# Altium PCB PCB1.PcbDoc
Units mil, origin at the board's own origin, x right, y up, seen from the top; angles counter-clockwise.
Board outline 2590 x 1505 mil, 2 copper layers (Top Layer, Bottom Layer); 24 components, 23 nets, 72 pads, 3 vias.
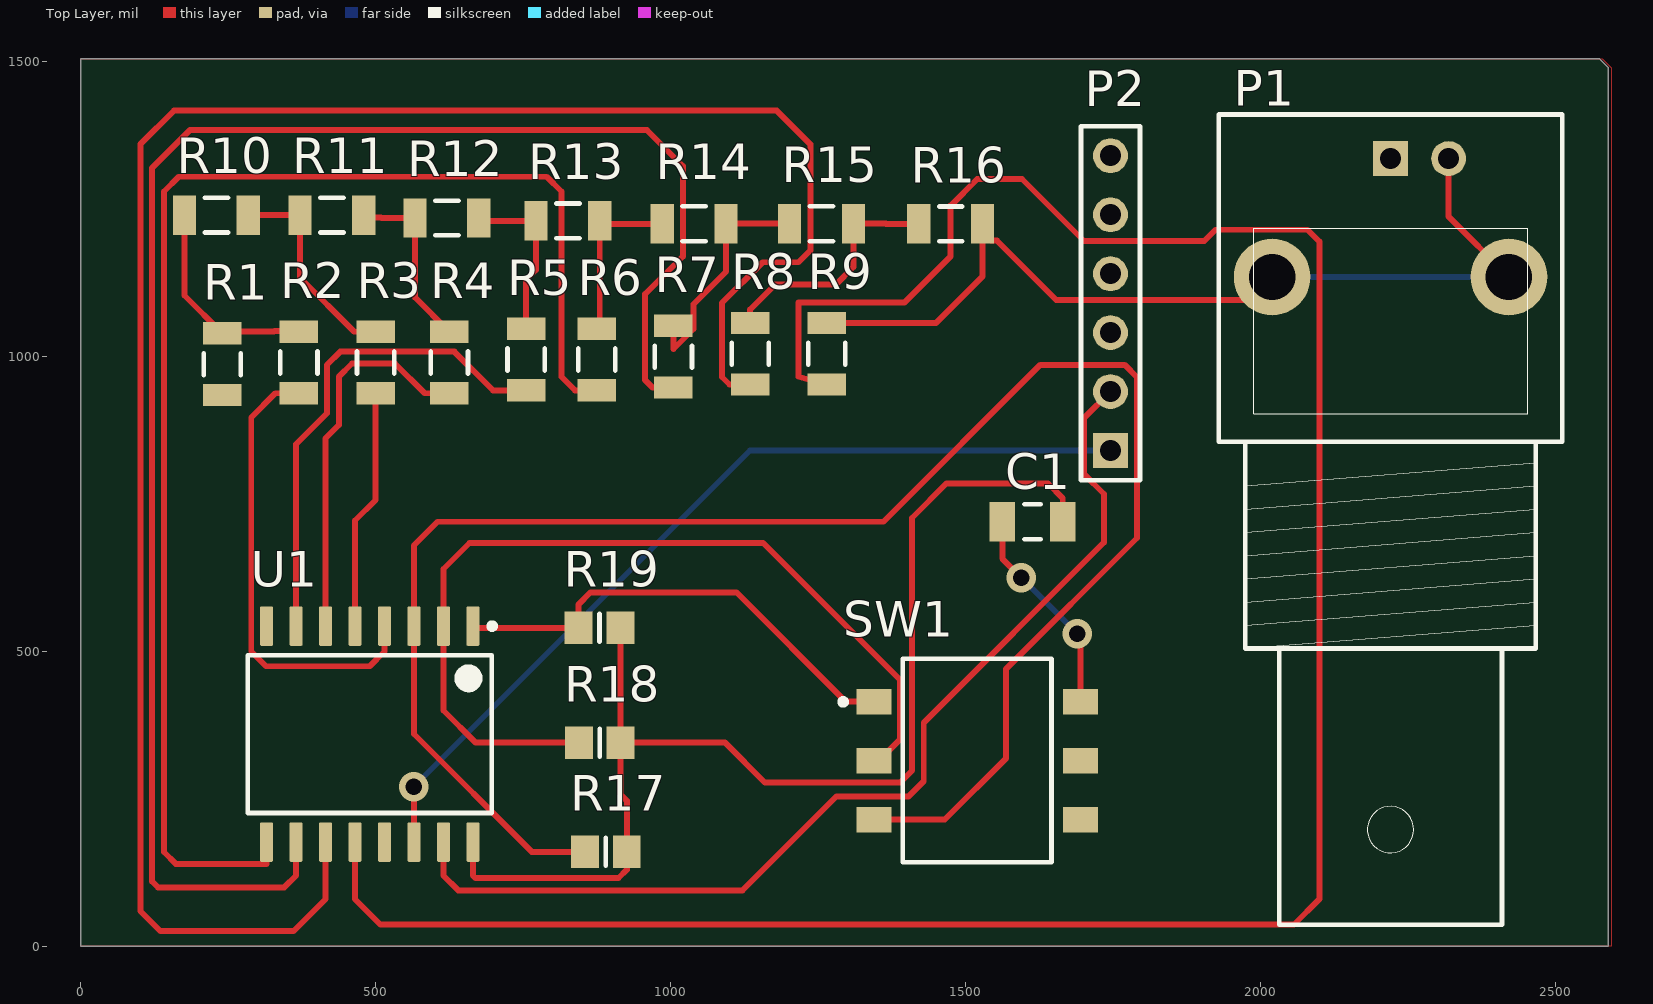
[diagram p0: Top Layer view]
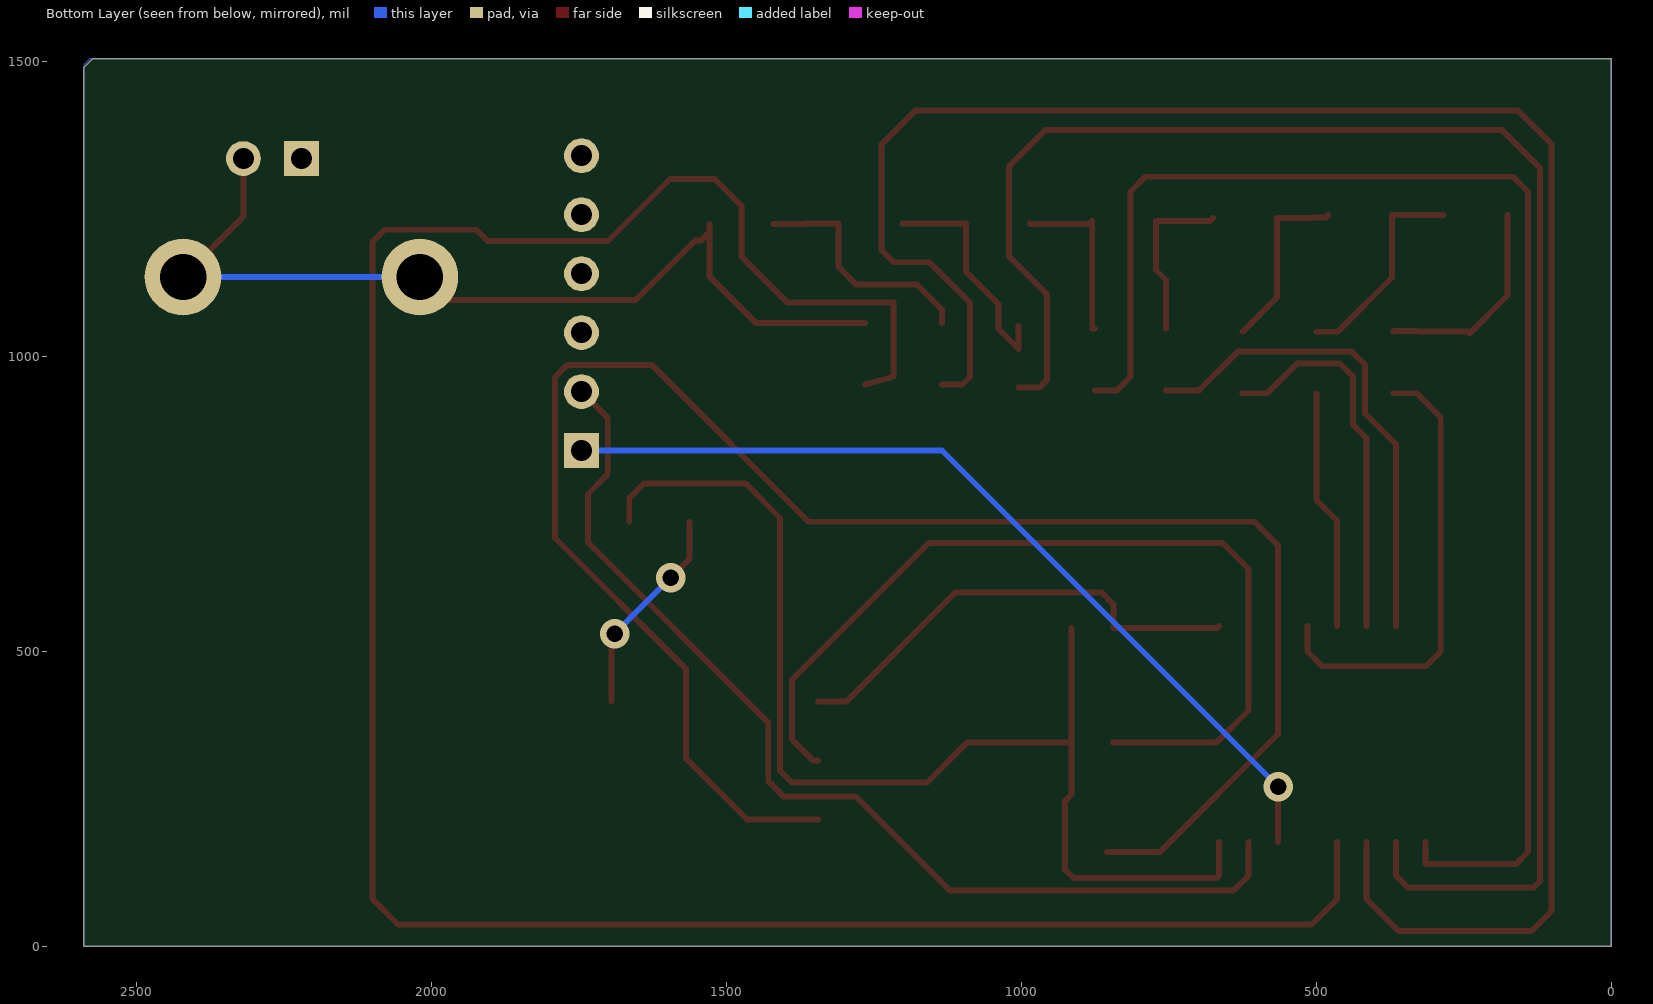
[diagram p1: Bottom Layer view, seen from below]

## Layer stack, top to bottom
Top Solder: solder mask 0.4, Solder Resist, Dk 3.5
Top Layer: signal copper 1.4
Dielectric 1: dielectric 12.6, FR-4, Dk 4.8
Bottom Layer: signal copper 1.4
Bottom Solder: solder mask 0.4, Solder Resist, Dk 3.5

## Board outline
0,0 0,1505 2575,1505 2590,1490 2590,0

## Design rules (kind name [scope] priority, off if disabled: settings)
Clearance [All] p1: gap=10 ignorepadtopadclearanceinfootprint=FALSE except(0: Arc-Hole Track-Hole SMDPad-Hole THPad-Hole Via-Hole Fill-Hole Poly-Hole Region-Hole Text-Hole)
PolygonConnect [All] p1: connectstyle=Relief reliefconductorwidth=10 reliefentries=4 polygonreliefangle="90 Angle" airgapwidth=10
RoutingVias [All] p1: holewidth=28 width=50 viastyle="Through Hole" minholewidth=28 minwidth=50 maxholewidth=28 maxwidth=50
SolderMaskExpansion [All] p1: expansion=4 istentingtop=FALSE
Width [All] p1: maxlimit=10 minlimit=10 preferedwidth=10
30 further rules are at their usual default settings.

## Components (designator, comment, footprint, x,y, rotation, side; value= is the part's Value field where it differs from the comment)
C1 "1uF" CAPC3216X110X50LL20T25 1613.82,720 r0 top
P1 "BNC" "BNC_RA CON" 2220.79,1335.79 r90 top
P2 "Header 6" HDR1X6 1745.98,840.63 r90 top
R1 "10k" FP-CRCW1206-e3-IPC_C 240,987.21 r90 top
R2 "10k" FP-CRCW1206-e3-IPC_C 370,990 r90 top
R3 "10k" FP-CRCW1206-e3-IPC_C 500,990 r90 top
R4 "10k" FP-CRCW1206-e3-IPC_C 625,990 r90 top
R5 "10k" FP-CRCW1206-e3-IPC_C 755,995 r90 top
R6 "10k" FP-CRCW1206-e3-IPC_C 875,995 r90 top
R7 "10k" FP-CRCW1206-e3-IPC_C 1005,1000 r90 top
R8 "10k" FP-CRCW1206-e3-IPC_C 1135,1005 r90 top
R9 "10k" FP-CRCW1206-e3-IPC_C 1265,1005 r90 top
R10 "5k" RESC3216X84X51LL20T13 230,1240 r0 top
R11 "5k" RESC3216X84X51LL20T13 425.87,1240 r0 top
R12 "5k" RESC3216X84X51LL20T13 620.87,1235 r0 top
R13 "5k" RESC3216X84X51LL20T13 825.87,1230 r0 top
R14 "5k" RESC3216X84X51LL20T13 1040,1225.35 r0 top
R15 "5k" RESC3216X84X51LL20T13 1255.87,1225.35 r0 top
R16 "5k" RESC3216X84X51LL20T13 1475,1225 r0 top
R17 "Res3" 6-0805_N 890.43,160.35 r0 top value=4.7K
R18 "Res3" 6-0805_N 880,345.35 r0 top value=4.7K
R19 "Res3" 6-0805_N 879.57,540 r0 top value=4.7K
SW1 "A6S-3101-H" FP-A6S-3101-H-MFG 1520,315 r270 top
U1 "PCA9554ADW" DW0016A_L 490,360 r270 top

## Footprints (in the part's own frame and the unit in brackets; to place one, negate y for a bottom-side part, rotate by r counter-clockwise, add the part's x,y. Pads: shape width x height; smd on the part's side, far side on the other; paste and mask are expansions set on the pad)
6-0805_N [mm] "Chip Resistor, Body 2.0x1.2mm, IPC Medium Density"
  rect 1.2x1.4 smd: 1(-0.9,0) 2(0.9,0)
  silkscreen extent 0,-0.6 0,0.6, body extent -1.07,-0.7 1.07,0.7, height 0.7
"BNC_RA CON" [mm] "Connector; BNC Elbow"
  rect 1.5x1.5 hole 0.9: 1(0,0)
  round 3.3 hole 2: 2(-5.1,-5.1) 2(-5.1,5.1)
  round 1.5 hole 0.9: 2(0,-2.5)
  silkscreen extent -33,-7.4 1.9,7.4
CAPC3216X110X50LL20T25 [mm] "Chip Capacitor, 2-Leads, Body 3.20x1.60mm, IPC High Density"
  rect 1.1x1.7 smd: 1(-1.3,0) 2(1.3,0)
  silkscreen extent -0.35,-0.75 0.35,0.75, body extent -1.7,-0.9 1.7,0.9, height 1.1
DW0016A_L [mm] "SOIC, 16-Leads, Body 10.5x7.6mm, Pitch 1.27mm, IPC High Density"
  rrect18% 1.7x0.55 smd: 1(-4.65,4.445) 2(-4.65,3.175) 3(-4.65,1.905) 4(-4.65,0.635) 5(-4.65,-0.635) 6(-4.65,-1.905) 7(-4.65,-3.175) 8(-4.65,-4.445) 9(4.65,-4.445) 10(4.65,-3.175) 11(4.65,-1.905) 12(4.65,-0.635) 13(4.65,0.635) 14(4.65,1.905) 15(4.65,3.175) 16(4.65,4.445)
  silkscreen extent -4.77,-5.25 3.4,5.4, body extent -5.14,-5.13 5.14,5.13, height 2.5
FP-A6S-3101-H-MFG [mm]
  rect 1.1x1.5 smd paste+0 mask+0: 1(-2.54,-4.45) 2(0,-4.45) 3(2.54,-4.45) 4(2.54,4.45) 5(0,4.45) 6(-2.54,4.45)
  silkscreen extent -4.38,-5.9 4.38,3.2, body extent -4.48,-5.3 4.48,5.3, height 0.25
FP-CRCW1206-e3-IPC_C [mil]
  rect 37.64x65.28 smd paste+0 mask+0: 1(-52.21,0) 2(52.21,0)
  silkscreen extent -19,-31 19,31, body extent -75,-38 75,38, height 10
HDR1X6 [mm] "Connector; Header; 6 Position"
  rect 1.5x1.5 hole 0.9: 1(0,0)
  round 1.5 hole 0.9: 2(2.54,0) 3(5.08,0) 4(7.62,0) 5(10.16,0) 6(12.7,0)
  silkscreen extent -1.27,-1.27 13.97,1.27
RESC3216X84X51LL20T13 [mm] "Chip Resistor, 2-Leads, Body 3.20x1.60mm, IPC High Density"
  rect 1x1.7 smd: 1(-1.375,0) 2(1.375,0)
  silkscreen extent -0.5,-0.75 0.5,0.75, body extent -1.7,-0.9 1.7,0.9, height 0.84

## Part data
C1: library part CMP-2000-06011-1, "Chip Capacitor, 1 uF, +/- 10%, 50 V, -55 to 125 degC, 1206 (3216 Metric), RoHS, Tape and Reel", Capacitance - nF=1000nF, Case Code - in=1206, Case Code - mm=3216, Case Height=1mm, Case Length=3.2mm, Case Width=1.6mm, Dielectric=X7R, Manufacturer=Kemet, Maximum Operating Temperature=+125C, Minimum Operating Temperature=-55C, Operating Temperature Range=-55Cto+125C, Package / Case=1206(3216metric), Package Description="2-Pin Surface Mount Device, Body 3.2 x 1.6 mm", Temperature Coefficient / Code=+/-15%, Tolerance=10%, Voltage Rating=50V, Brand=Kemet, Capacitance=1uF, Class=Class1, Datasheet URL=http://www.kemet.com/docfinder?Partnumber=C1206C105K5RACTU, Datasheet Version=02/2016, Dimensions=1.6mmWx3.2mmLx1mmH, Factory Pack Quantity=2500, Manufacturer URL=http://www.kemet.com/, Mounting Technology=SurfaceMount, Package Reference=1206, Packaging=Reel, Product=GeneralTypeMLCCs, Product Category=MultilayerCeramicCapacitorsMLCC-SMD/SMT, RoHS=Details, Series=C1206C, Termination Style=SMD/SMT, Type=SMDMLCCX7R6.3-250VDCCommericalGrade, Voltage Rating DC=50V
P1: "BNC Elbow Connector", LatestRevisionDate=17-Jul-2002, LatestRevisionNote="Re-released for DXP Platform.", Publisher="Altium Limited"
P2: "Header, 6-Pin", LatestRevisionDate=17-Jul-2002, LatestRevisionNote="Re-released for DXP Platform.", Publisher="Altium Limited"
R1 R2 R3 R4 R5 R6 R7 R8 R9: library part CMP-2003-04807-2, "RES Thick Film, 10kΩ, 1%, 0.25W, 100ppm/°C, 1206", Case Code (Imperial)=1206, Case Code (Metric)=3216, Max Operating Temperature=155°C, Max Power Dissipation=250mW, Min Operating Temperature=-55°C, Package Quantity=10, Resistance=10kR, Temperature Coefficient=100ppm/°C, Tolerance=1%, Voltage Rating=200V, Case/Package=1206, Composition="Thick Film", Contact Plating=Tin, Depth=1.6mm, Features="Automotive AEC-Q200", Height=0.55mm, Lead Free="Lead Free", Length=3.2mm, Military Standard=Not, Number of Pins=2, Number of Terminations=2, Packaging="Tape and Reel", Power Rating=250mW, Radiation Hardening=No, Termination=SMD/SMT, Voltage Rating (DC)=200V, Weight=0.000353oz, Width=0.063inch, Working Voltage=200V
R10 R11 R12 R13 R14 R15 R16: library part CMP-2003-04380-1, Manufacturer="Vishay Dale", Part Number=PNM1206E5001BST5
R17 R18 R19: "Resistor", LatestRevisionDate=29-May-2009, LatestRevisionNote="IPC-7351 Footprint Added.", PackageDescription="Chip Resistor", PackageReference=J1-0603, Published=8-Jun-2000, Publisher="Altium Limited"
SW1: library part CMP-08827-000069-1, "SWITCH SLIDE DIP SPST 25MA 24V", Case/Package=DIP, Contact Current Rating=25mA, Contact Resistance=200mR, Max Operating Temperature=70°C, Max Voltage Rating (DC)=24V, Min Operating Temperature=-20°C, Package Quantity=55, Actuator Length=0mm, Actuator Type="Slide (Standard)", Contact Material=Gold, Contact Plating=Gold, Current Rating=25mA, Electrical Life=1000Cycles, Length=0.337inch, Max Current Rating=25mA, Mechanical Life=1000Cycles, Mount="Surface Mount", Number of Circuits=3, Number of Positions=3, Orientation=Straight, Packaging=Rail/Tube, Pitch=0.1inch, REACH SVHC="No SVHC", RoHS Compliant=Yes, Series=A6S-H, Terminal Pitch=2.54mm, Termination="Gull Wing", Throw Configuration=SPST, Voltage Rating (DC)=24V, Washable=No
U1: library part CMP-0314-00172-2, "Remote 8-Bit I2C and SMBus I/O Expander with Interrupt Output and Configuration Registers, 8 Outputs, 2.3 to 5.5 V, -40 to 85 degC, 16-pin SOIC (DW), Green (RoHS & no Sb/Br)", 5V Tolerant I/O=Yes, Manufacturer="Texas Instruments", Max Frequency(kHz)=400, # of I/Os=8, Code_JEDEC=MS-013-AA, ComponentLink1Description=Datasheet, ComponentLink1URL=http://www.ti.com/general/docs/lit/getliterature.tsp?genericPartNumber=PCA9554A&fileType=pdf, ComponentLink2Description="Package Specification", ComponentLink2URL=http://www.ti.com/litv/pdf/msoi003g, Configuration Registers=Yes, DatasheetVersion=SCPS127D, Eco-Plan="Green (RoHS & no Sb/Br)", fSCLK(Max)(MHz)="0.1, 0.4", I2C Address="0111 xxx", Interrupt Output=Yes, Mounting Technology="Surface Mount", No. of Outputs=8, PackageDescription="16-Pin Small Outline Integrated Circuit, 10.3 x 7.5 mm, Pitch 1.27 mm Pitch", PackageReference=DW0016A, PackageVersion="revG, Jan-2011", PartNumber=PCA9554ADW, Push-Pull I/O Type=Yes, SubFamily="I2C IO Expander", Vcc range(V)="2.3 to 5.5", VCC(Max)(V)=5.5, VCC(Min)(V)=2.3

## Via types
v1: diameter 50, hole 28, Top Layer to Bottom Layer, 3 vias

## Nets (pads, with @x,y where several pads share a name; then routed paths per layer and width w, separated by ;. In a path a pad name is that pad's centre, name@x,y a point inside that pad or via, vN(x,y) a via of type N, cw(c..) or ccw(c..) an arc to the next point about the centre after c; other vN are vias at no path point)
+3V3: C1.2 R17.2 R18.2 R19.2 U1.16 | length 2028.6
  Top Layer w10: U1.16 665,120 669.13,115.87 911.73,115.87 925.87,130 R17.2 925.87,247 915.43,257.43 R18.2 ; R19.2 915,442.43 915.43,442 R18.2 ; C1.2 1665,760 1640,785 1468,785 1409.33,726.33 1409.33,298 1389.33,278 1160,278 1092.65,345.35 R18.2
A0: R19.1 SW1.1 U1.1 | length 806
  Top Layer w10: U1.1 668.07,540 R19.1 844.13,580 864.13,600 1112,600 1297,415 SW1.1
A1: R18.1 SW1.2 U1.2 | length 1540.9
  Top Layer w10: R18.1 669.65,345.35 615,400 U1.2 615,640 659,684 1156.98,684 1389.33,451.65 1389.33,351.33 1353,315 SW1.2
A2: R17.1 SW1.3 U1.3 | length 3059.4
  Top Layer w10: R17.1 764.65,160.35 565,360 U1.3 565,680 605,720 1361,720 1627,986 1770,986 1791,965 1791,692.57 1569,470.57 1569,319 1465,215 SW1.3
GND: C1.1 P1.1 P2.6 R1.1 SW1.4 SW1.5 SW1.6 U1.8 | length 359.9
  Top Layer w10: C1.1 1562.64,657.36 v1(1595,625) ; v1(1690,530) 1695,525 1695,415.2 SW1.6
  Bottom Layer w10: v1(1595,625) v1(1690,530)
NetP1_2: P1.2 R9.2 R16.2 | length 1617.8
  Top Layer w10: R9.2 1450.34,1057.21 1529.13,1136 R16.2 ; R16.2@1529.13,1220.87 1529.13,1211.22 1543.82,1196.54 1553.46,1196.54 1654,1096 2020,1096 P1.2@2020,1135 ; P1.2@2319.21,1335.79 2319.21,1237.36 P1.2@2421.58,1135
  Bottom Layer w10: P1.2@2020,1135 P1.2@2421.58,1135
NetR1_2: R1.2 R2.2 R10.1 | length 359.1
  Top Layer w10: R10.1 175.87,1103.55 R1.2 242.89,1042.31 327.31,1042.31 328.22,1043.22 368.99,1043.22 R2.2
NetR2_1: R2.1 U1.4 | length 784.6
  Top Layer w10: R2.1 330,937.79 289,896.79 289,500 314,475 490,475 515,500 U1.4
NetR3_1: R3.1 U1.5 | length 409.2
  Top Layer w10: U1.5 465,722 500,757 R3.1
NetR3_2: R3.2 R10.2 R11.1 | length 359.9
  Top Layer w10: R10.2 R11.1 371.73,1134 463.52,1042.21 R3.2
NetR4_1: R4.1 U1.6 | length 649.9
  Top Layer w10: U1.6 415,861.33 437.64,883.97 437.64,966.03 460,988.39 532.61,988.39 583.21,937.79 R4.1
NetR4_2: R4.2 R11.2 R12.1 | length 305.7
  Top Layer w10: R11.2 483.83,1236.17 508.83,1236.17 510,1235 R12.1 566.73,1100.48 R4.2
NetR5_1: R5.1 U1.7 | length 838.5
  Top Layer w10: U1.7 365,851.33 417.64,903.97 417.64,986.03 440,1008.39 633.41,1008.39 699,942.79 R5.1
NetR5_2: R5.2 R12.2 R13.1 | length 288.5
  Top Layer w10: R12.2 680,1230 R13.1 771.73,1146.73 755,1130 R5.2
NetR6_1: R6.1 U1.9 | length 2417.7
  Top Layer w10: U1.9 315,140 161,140 141,160 141,1280 166,1305 790,1305 815,1280 815,965.79 838,942.79 R6.1
NetR6_2: R6.2 R13.2 R14.1 | length 290.9
  Top Layer w10: R6.2 880,1047.21 880,1223.78 R13.2@880,1225 ; R13.2 885,1225 985.51,1225 R14.1
NetR7_1: R7.1 U1.10 | length 2917.7
  Top Layer w10: U1.10 365,120 345,100 131,100 121,110 121,1320 185,1384 960,1384 1021,1323 1021,1170 957,1106 957,960 969.21,947.79 R7.1
NetR7_2: R7.2 R14.2 R15.1 | length 396.1
  Top Layer w10: R7.2 1005,1013 1038.95,1046.95 1038.95,1088.82 1094.13,1144 R14.2 R15.1
NetR8_1: R8.1 U1.11 | length 3475.6
  Top Layer w10: U1.11 415,80 361,26 135,26 101,60 101,1360 158,1417 1180,1417 1237,1360 1237,1180 1217,1160 1156.33,1160 1087.36,1091.03 1087.36,965.44 1100,952.79 R8.1
NetR8_2: R8.2 R15.2 R16.1 | length 412
  Top Layer w10: R8.2 1135,1080 1177,1122 1280,1122 1310,1152 R15.2 1365,1225.35 1365.35,1225 R16.1
NetR9_1: R9.1 U1.12 | length 4138.1
  Top Layer w10: U1.12 465,80 508,37 2057,37 2100,80 2100,1195 2080,1215 1924,1215 1905,1196 1701,1196 1596,1301 1520,1301 1475,1256 1475,1170 1397,1092 1217,1092 1217,965.79 R9.1
SCL: P2.1 U1.14 | length 1511
  Top Layer w10: U1.14 v1(565,271)
  Bottom Layer w10: v1(565,271) 1134.63,840.63 P2.1
SDA: P2.2 U1.15 | length 1777.8
  Top Layer w10: U1.15 615,120 640,95 1122,95 1281.44,254.44 1403.77,254.44 1429.33,280 1429.33,379.33 1735,685 1735,767.14 1701.46,800.69 1701.46,896.1 P2.2
pads on no net: P2.3 P2.4 P2.5 U1.13

## Polygon pours and split planes (outlines as drawn)
GND on Top Layer "NONET_L01_P000" (solid, shelved, pour order 0): 0,0 0,1505 2580,1505 2595,1490 2595,0
GND on Bottom Layer "NONET_L02_P001" (solid, shelved, pour order 1): 0,0 0,1505 2580,1505 2590,1495 2590,0